# Altium PCB PCB1.PcbDoc
Units mm, origin at the board's own origin, x right, y up, seen from the top; angles counter-clockwise.
Board outline 152.4 x 101.6 mm, 2 copper layers (Top Layer, Bottom Layer); 8 components, 12 nets, 41 pads, 0 vias.
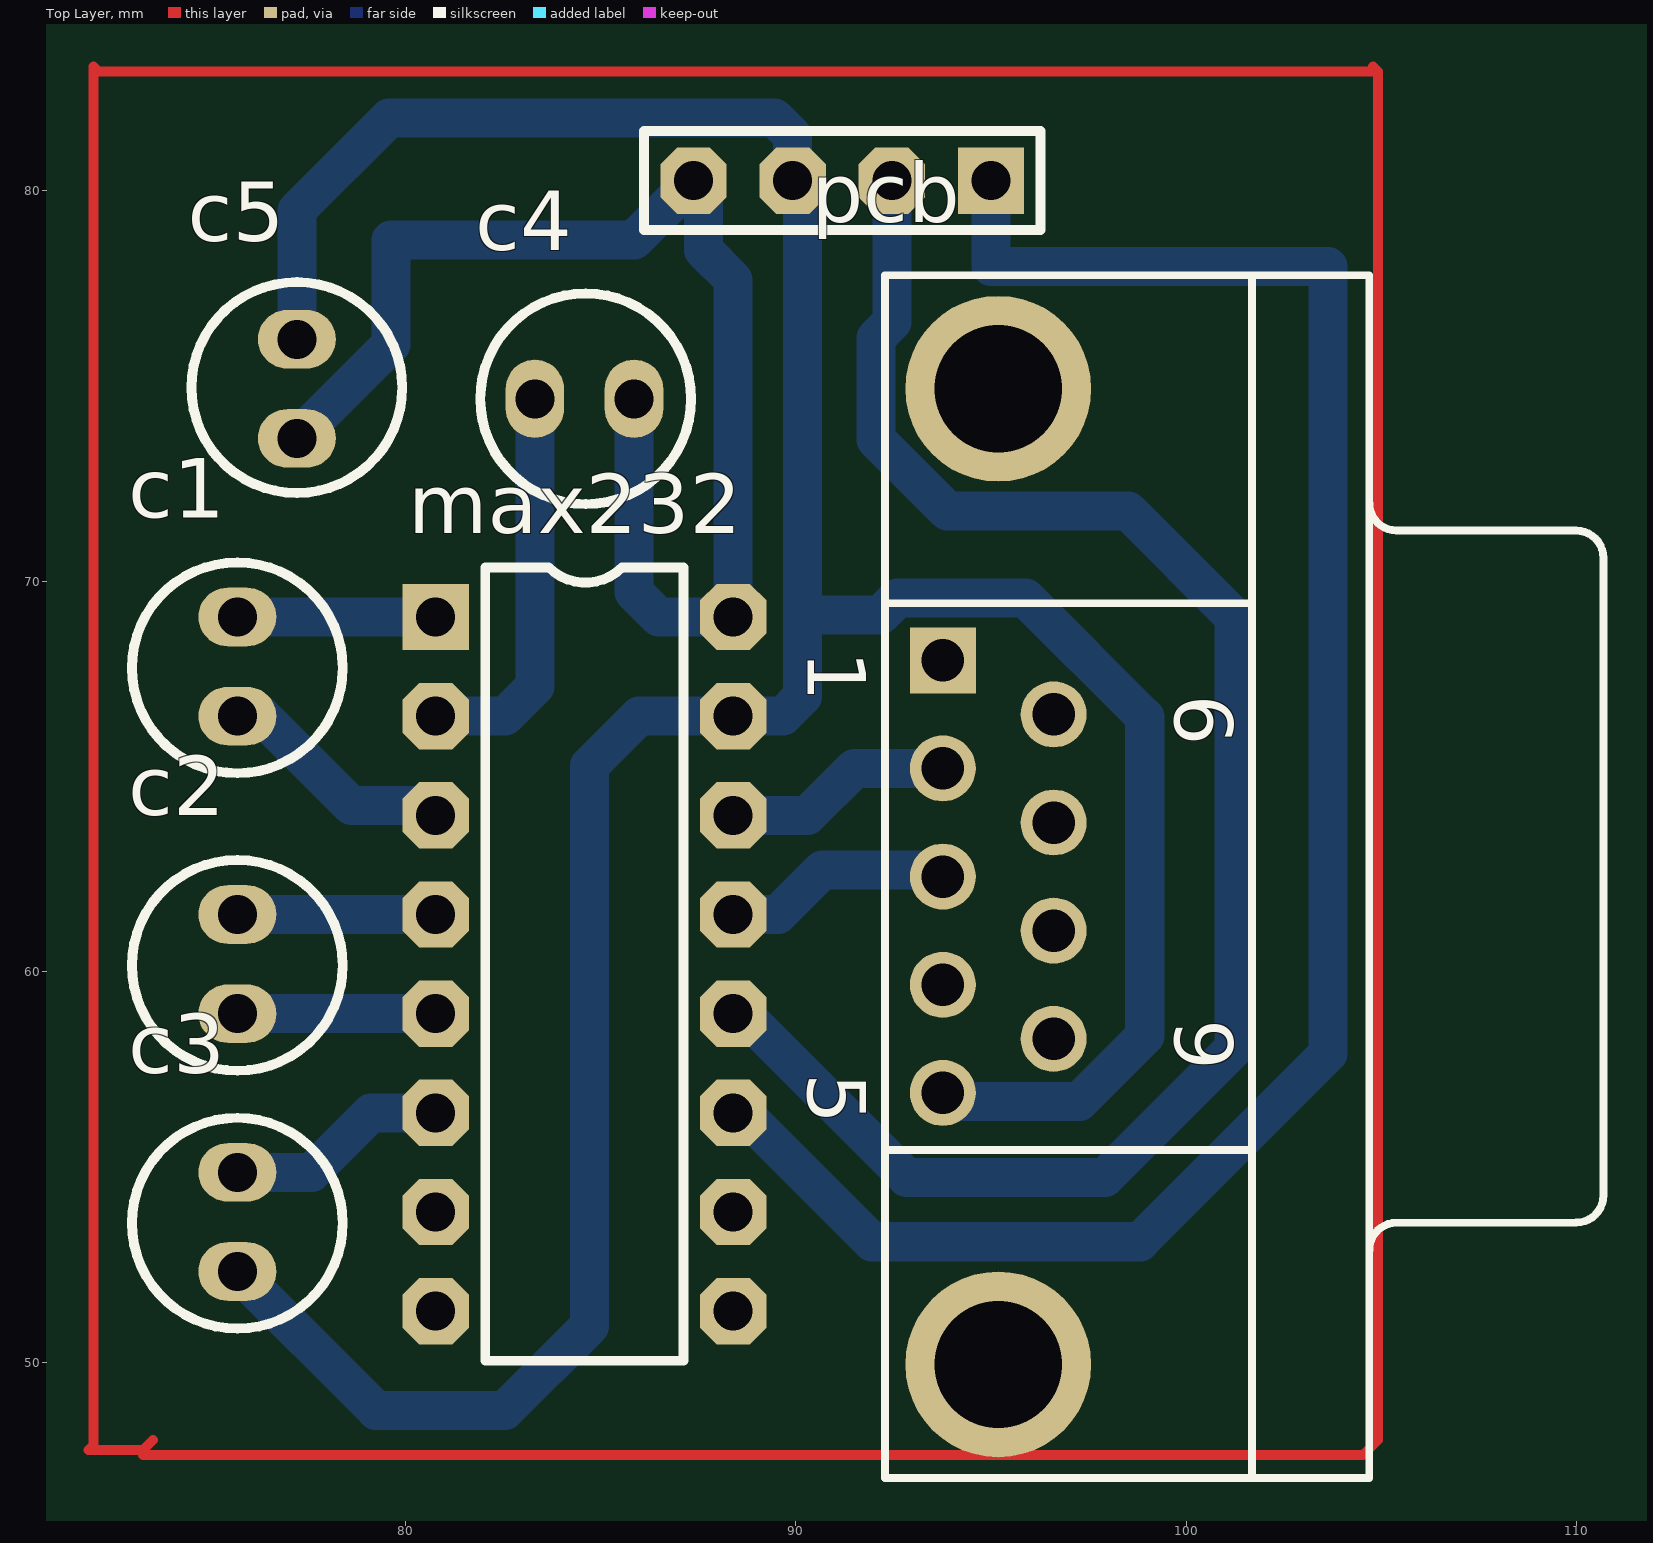
[diagram p0: Top Layer view]
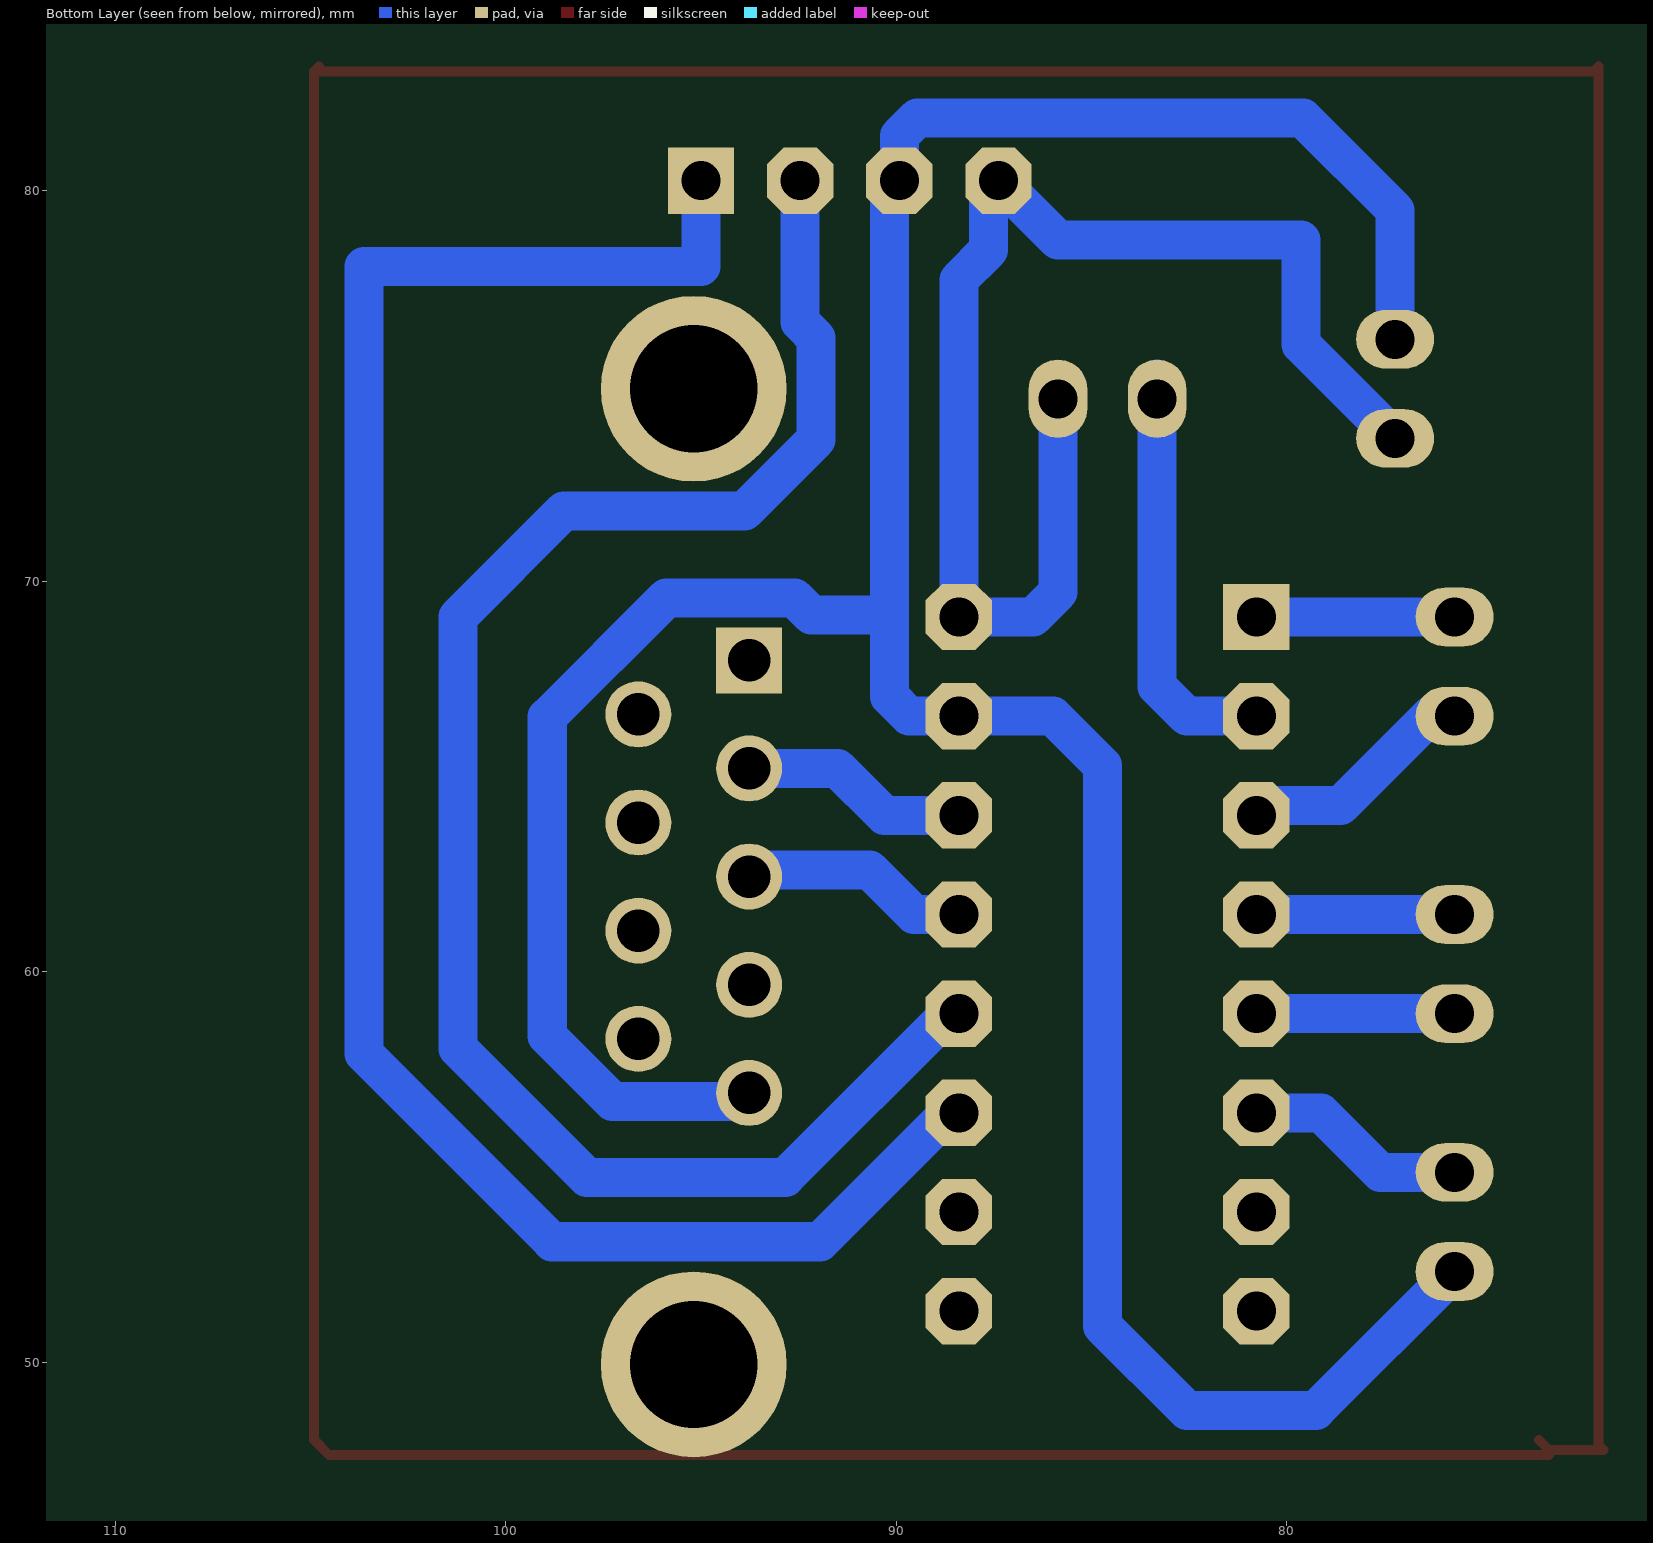
[diagram p1: Bottom Layer view, seen from below]

## Layer stack, top to bottom
Top Layer: signal copper 0.0356
Dielectric: dielectric 0.32, FR-4, Dk 4.8
Bottom Layer: signal copper 0.0356

## Board outline
25.4,25.4 177.8,25.4 177.8,127 25.4,127

## Design rules (kind name [scope] priority, off if disabled: settings)
Clearance [All] p1: gap=0.254
PolygonConnect [All] p1: connectstyle=Relief reliefconductorwidth=0.254 reliefentries=4 polygonreliefangle="90 Angle"
RoutingVias [All] p1: holewidth=0.711 width=1.27 viastyle="Through Hole" minholewidth=0.711 minwidth=1.27 maxholewidth=0.711 maxwidth=1.27
SilkscreenOverComponentPads [All] p1: minsilkscreentomaskgap=0.254
SolderMaskExpansion [All] p1: expansion=0.102
Width [All] p1: maxlimit=1 minlimit=1 preferedwidth=1
27 further rules are at their usual default settings.

## Components (designator, comment, footprint, x,y, rotation, side; value= is the part's Value field where it differs from the comment)
c1 "Cap" CAP 75.692,66.548 r90 top
c2 "Cap" CAP 75.692,58.928 r90 top
c3 "Cap" CAP 75.692,52.324 r90 top
c4 "Cap" CAP 85.852,74.676 r180 top
c5 "Cap" CAP 77.216,76.2 r270 top
max232 "" dip-16pin 80.772,69.088 r0 top
pcb "PC DB9 Female" "DB9 CONNECTOR FEMALE" 105.156,62.992 r270 top
? "b1" bergstrip-4pin 94.996,80.264 r90 top

## Footprints (in the part's own frame and the unit in brackets; to place one, negate y for a bottom-side part, rotate by r counter-clockwise, add the part's x,y. Pads: shape width x height; smd on the part's side, far side on the other; paste and mask are expansions set on the pad)
bergstrip-4pin [mm]
  rect 1.7x1.7 hole 1: 1(0,0)
  oct 1.7x1.7 hole 1: 2(0,2.54) 3(0,5.08) 4(0,7.62)
  silkscreen extent -1.27,-1.27 1.27,8.89, body extent -1.27,-1.27 1.27,8.89, height 9.89
CAP [mm]
  oval 1.5x2 hole 1: 1(0,0) 2(2.54,0)
  silkscreen extent -1.46,-2.7 3.94,2.7, body extent -1.75,-3.04 4.32,3.04, height 7.01
"DB9 CONNECTOR FEMALE" [mm]
  rect 1.69x1.69 hole 1.09: 1(-4.986,-11.395)
  round 1.69 hole 1.09: 2(-2.216,-11.395) 3(0.554,-11.395) 4(3.324,-11.395) 5(6.094,-11.395) 6(-3.601,-8.555) 7(-0.831,-8.555) 8(1.939,-8.555) 9(4.709,-8.555)
  round 4.76 hole 3.26: 10(-11.941,-9.975) 11(13.049,-9.975)
  silkscreen extent -14.85,-12.88 15.95,5.53, body extent -14.94,-12.92 16.05,5.62, height 15
dip-16pin [mm]
  rect 1.7x1.7 hole 1: 1(0,0)
  oct 1.7x1.7 hole 1: 2(0,-2.54) 3(0,-5.08) 4(0,-7.62) 5(0,-10.16) 6(0,-12.7) 7(0,-15.24) 8(0,-17.78) 9(7.62,-17.78) 10(7.62,-15.24) 11(7.62,-12.7) 12(7.62,-10.16) 13(7.62,-7.62) 14(7.62,-5.08) 15(7.62,-2.54) 16(7.62,0)
  silkscreen extent 1.27,-19.05 6.35,1.27, body extent -0.13,-19.05 7.87,1.27, height 2.51

## Part data
c1 c2 c3 c4 c5: "Capacitor"
max232: library part dip-16pin
pcb: library part "DB9 CONNECTOR FEMALE"
?: library part "BURG STRIP 4"

## Nets (pads, with @x,y where several pads share a name; then routed paths per layer and width w, separated by ;. In a path a pad name is that pad's centre, name@x,y a point inside that pad or via, vN(x,y) a via of type N, cw(c..) or ccw(c..) an arc to the next point about the centre after c; other vN are vias at no path point)
1: c1.2 max232.1 | length 5.1
  Bottom Layer w1: c1.2 max232.1
2: c4.2 max232.2 | length 10.7
  Bottom Layer w1: max232.2 82.55,66.548 83.312,67.31 c4.2@83.312,75.184
3: c1.1 max232.3 | length 5.8
  Bottom Layer w1: c1.1 76.327,66.548 78.613,64.262 max232.3@80.518,64.262
4: c2.2 max232.4 | length 5.1
  Bottom Layer w1: c2.2 max232.4
5: c2.1 max232.5 | length 5.1
  Bottom Layer w1: c2.1 max232.5
6: c3.2 max232.6 | length 5.7
  Bottom Layer w1: c3.2 77.597,54.864 79.121,56.388 max232.6
13: max232.13 pcb.3 | length 5.7
  Bottom Layer w1: max232.13 89.535,61.468 90.678,62.611 pcb.3@93.588,62.611
14: max232.14 pcb.2 | length 5.9
  Bottom Layer w1: max232.14 90.297,64.008 91.497,65.208 pcb.2
GND: ?.3 c3.1 c5.1 max232.15 pcb.5 | length 87.9
  Bottom Layer w1: c3.1 79.248,48.768 82.55,48.768 84.709,50.927 84.709,65.278 85.979,66.548 max232.15 89.662,66.548 90.17,67.056 90.17,80.01 ?.3 89.916,81.407 89.455,81.868 79.582,81.868 77.216,79.502 c5.1 ; 90.203,69.135 92.162,69.135 92.604,69.577 95.878,69.577 98.933,66.522 98.933,58.354 97.263,56.684 93.975,56.684 pcb.5
RX: ?.2 max232.12 | length 45.2
  Bottom Layer w1: max232.12@88.679,58.641 max232.12 88.646,58.928 92.837,54.737 97.917,54.737 101.219,58.039 101.219,69.088 98.508,71.799 93.883,71.799 92.047,73.635 92.047,76.231 92.456,76.64 ?.2
TX: ?.1 max232.11 | length 49.6
  Bottom Layer w1: max232.11 88.646,56.388 91.948,53.086 98.806,53.086 103.632,57.912 103.632,78.067 94.996,78.067 ?.1
VCC: ?.4 c4.1 c5.2 max232.16 | length 33.8
  Bottom Layer w1: c5.2 79.629,76.073 79.629,78.74 85.852,78.74 ?.4 ; c4.1@85.852,75.057 c4.1 85.852,69.723 86.487,69.088 max232.16 88.392,77.724 87.63,78.486 ?.4@87.63,80.01
pads on no net: max232.7 max232.8 max232.9 max232.10 pcb.1 pcb.4 pcb.6 pcb.7 pcb.8 pcb.9 pcb.10 pcb.11
copper on no net: | length 137.2
  Top Layer w0.254: 73.279,47.625 104.521,47.625 104.902,48.006 104.902,83.058 ; 73.533,48.006 73.279,47.752 71.882,47.752 72.009,47.879 72.009,83.185 72.136,83.058 104.902,83.058 ; 104.775,83.185 104.902,83.058

## Text inside footprints (layer, text, board x,y; h text height)
pcb: Top Overlay "1" at 90.306,68.228 h1.5 r270; Top Overlay "5" at 90.306,57.398 h1.5 r270; Top Overlay "9" at 99.706,58.783 h1.5 r270; Top Overlay "6" at 99.706,67.093 h1.5 r270